# EAGLE board Ref_pcb_lite (EAGLE 8.5.0)
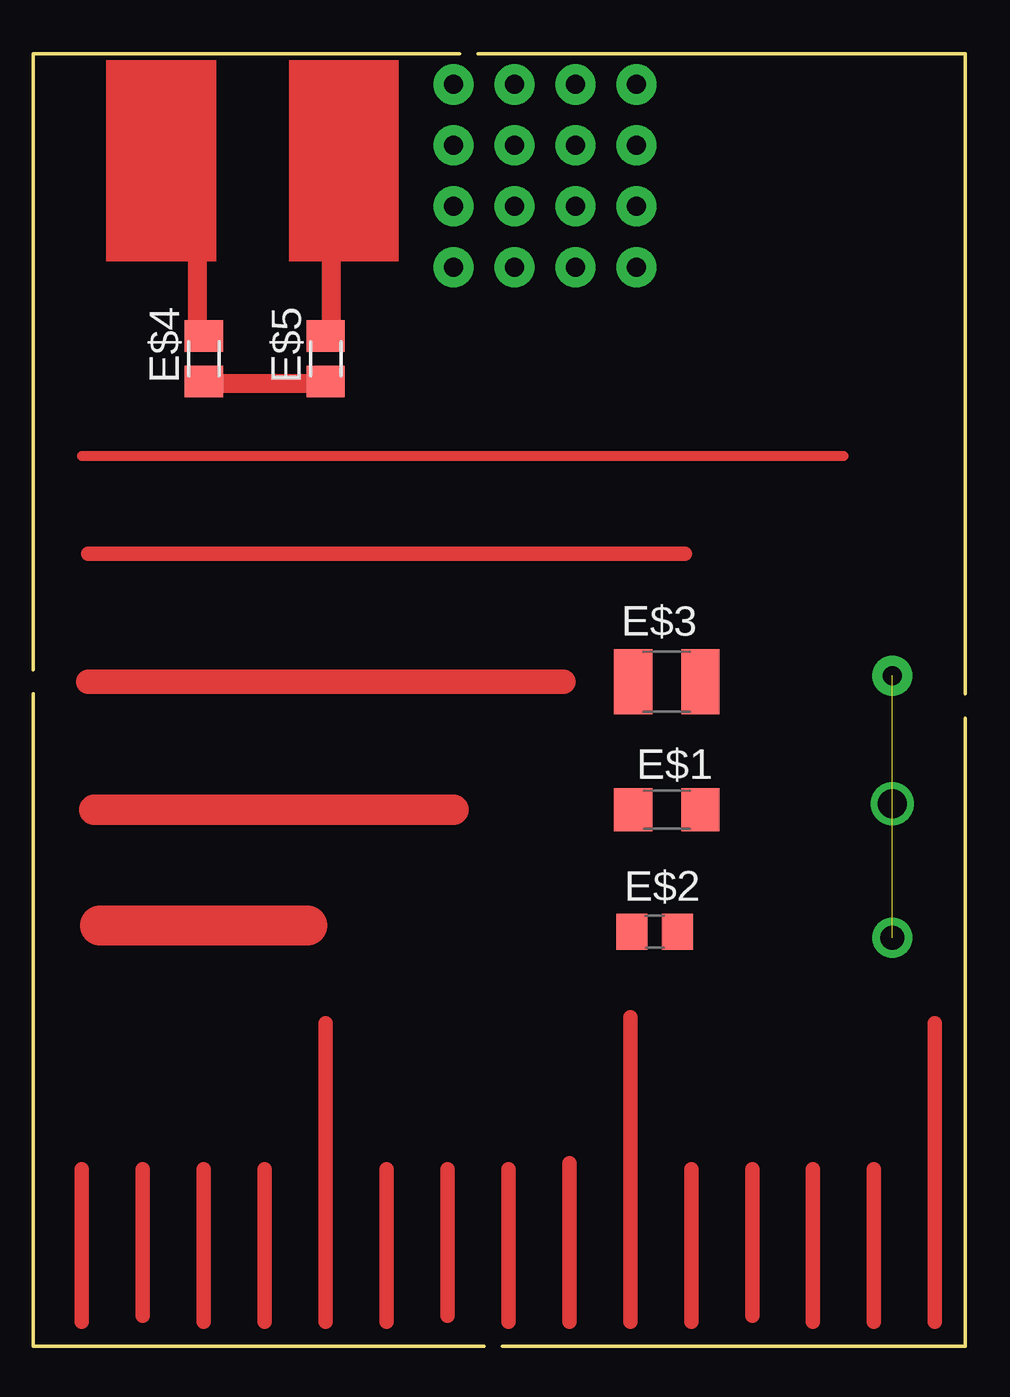
[diagram p0: board, top side]

No outline drawn. Coordinates in mm, seen from the top.
Copper layers (1*16): Top 0.035mm / dielectric 1.5mm / Bottom 0.035mm
Design rules "default": minimum track width 10mil, minimum drill 24mil, track to track 8mil, track to pad 8mil, pad to pad 8mil, via to via 8mil, smd to smd 8mil, copper to edge 40mil, drill to drill 8mil, minimum pad ring 10mil, minimum via ring 8mil, stop-mask expansion 4mil, vias tented up to drill 0mil, thermal gap 10mil
Milling: 8 lines

## Footprints (pad centres in the part's own frame; a part is rotated, then mirrored left to right if it is on the bottom)
C1206 = smd 1.6 x 1.8: 1 -1.4,0; 2 1.4,0
C0805 = smd 1.3 x 1.5: 1 -0.95,0; 2 0.95,0
C1210 = smd 1.6 x 2.7: 1 -1.4,0; 2 1.4,0
M0805 = smd 1.3 x 1.6: 1 -0.95,0; 2 0.95,0

## Placement (x,y rotation side)
E$1  [C1206]  26.42,22.35 0 top
E$2  [C0805]  25.91,17.27 0 top
E$3  [C1210]  26.42,27.69 0 top
E$4  [M0805]  7.11,41.15 90 top
E$5  [M0805]  12.19,41.15 90 top

## Library data of the parts
E$1-E$3 = rcl
E$4 E$5 = acg_library

## Tracks (layer width: path | path; a pad name or v marks a point on that pad's centre or on a via)
S$16
  Top 0.61: 2.03,1.02 2.03,7.37
S$17
  Top 0.61: 4.57,1.27 4.57,7.37
S$18
  Top 0.61: 7.11,1.02 7.11,7.37
S$19
  Top 0.61: 9.65,1.02 9.65,7.37
S$20
  Top 0.61: 12.19,1.02 12.19,13.46
S$21
  Top 0.61: 14.73,1.02 14.73,7.37
S$22
  Top 0.61: 17.27,1.27 17.27,7.37
S$23
  Top 0.61: 19.81,1.02 19.81,7.37
S$24
  Top 0.61: 22.35,1.02 22.35,7.62
S$25
  Top 0.61: 24.89,1.02 24.89,13.72
S$26
  Top 0.61: 27.43,1.02 27.43,7.37
S$27
  Top 0.61: 29.97,1.27 29.97,7.37
S$28
  Top 0.61: 32.51,1.02 32.51,7.37
S$29
  Top 0.61: 35.05,1.02 35.05,7.37
S$30
  Top 0.61: 37.59,1.02 37.59,13.46
S$39
  Top 1.27: 17.53,22.35 2.54,22.35
S$40
  Top 1.676: 11.43,17.53 2.79,17.53
S$41
  Top 0.406: 33.78,37.08 2.03,37.08
S$42  (via drill 0.8 pad 1.68, 1 pad 1.68, 1.2 pad 1.68)  (2 unrouted)
  other vias: 35.81,27.94 35.81,17.02 35.81,22.61
S$47  (via drill 0.8 pad 1.68)
  other vias: 17.53,52.58
S$48  (via drill 0.8 pad 1.68)
  other vias: 20.07,52.58
S$49  (via drill 0.8 pad 1.68)
  other vias: 22.61,52.58
S$50  (via drill 0.8 pad 1.68)
  other vias: 25.15,52.58
S$51
  Top 0.8: 6.86,42.16 6.86,46.48
S$52
  Top 0.8: 7.11,40.13 12.19,40.13
S$57  (via drill 0.8 pad 1.68)
  other vias: 17.53,50.04
S$58  (via drill 0.8 pad 1.68)
  other vias: 20.07,50.04
S$59  (via drill 0.8 pad 1.68)
  other vias: 22.61,50.04
S$60  (via drill 0.8 pad 1.68)
  other vias: 25.15,50.04
S$61
  Top 0.8: 12.45,42.42 12.45,45.97
S$67  (via drill 0.8 pad 1.68)
  other vias: 17.53,47.5
S$68  (via drill 0.8 pad 1.68)
  other vias: 20.07,47.5
S$69  (via drill 0.8 pad 1.68)
  other vias: 22.61,47.5
S$70  (via drill 0.8 pad 1.68)
  other vias: 25.15,47.5
S$77  (via drill 0.8 pad 1.68)
  other vias: 17.53,44.96
S$78  (via drill 0.8 pad 1.68)
  other vias: 20.07,44.96
S$79  (via drill 0.8 pad 1.68)
  other vias: 22.61,44.96
S$80  (via drill 0.8 pad 1.68)
  other vias: 25.15,44.96
S$123
  Top 0.61: 27.18,33.02 2.29,33.02
S$124
  Top 1.016: 22.1,27.69 2.29,27.69
(copper drawn outside any net)
  shapes: Top area x2